# Altium PCB d_efx.PcbDoc (part 2 of 2)
Units mm, origin at the board's own origin, x right, y up, seen from the top; angles counter-clockwise.
Board outline 73.09 x 90.97 mm, 2 copper layers (Top Layer, Bottom Layer); 115 components, 88 nets, 354 pads, 67 vias.
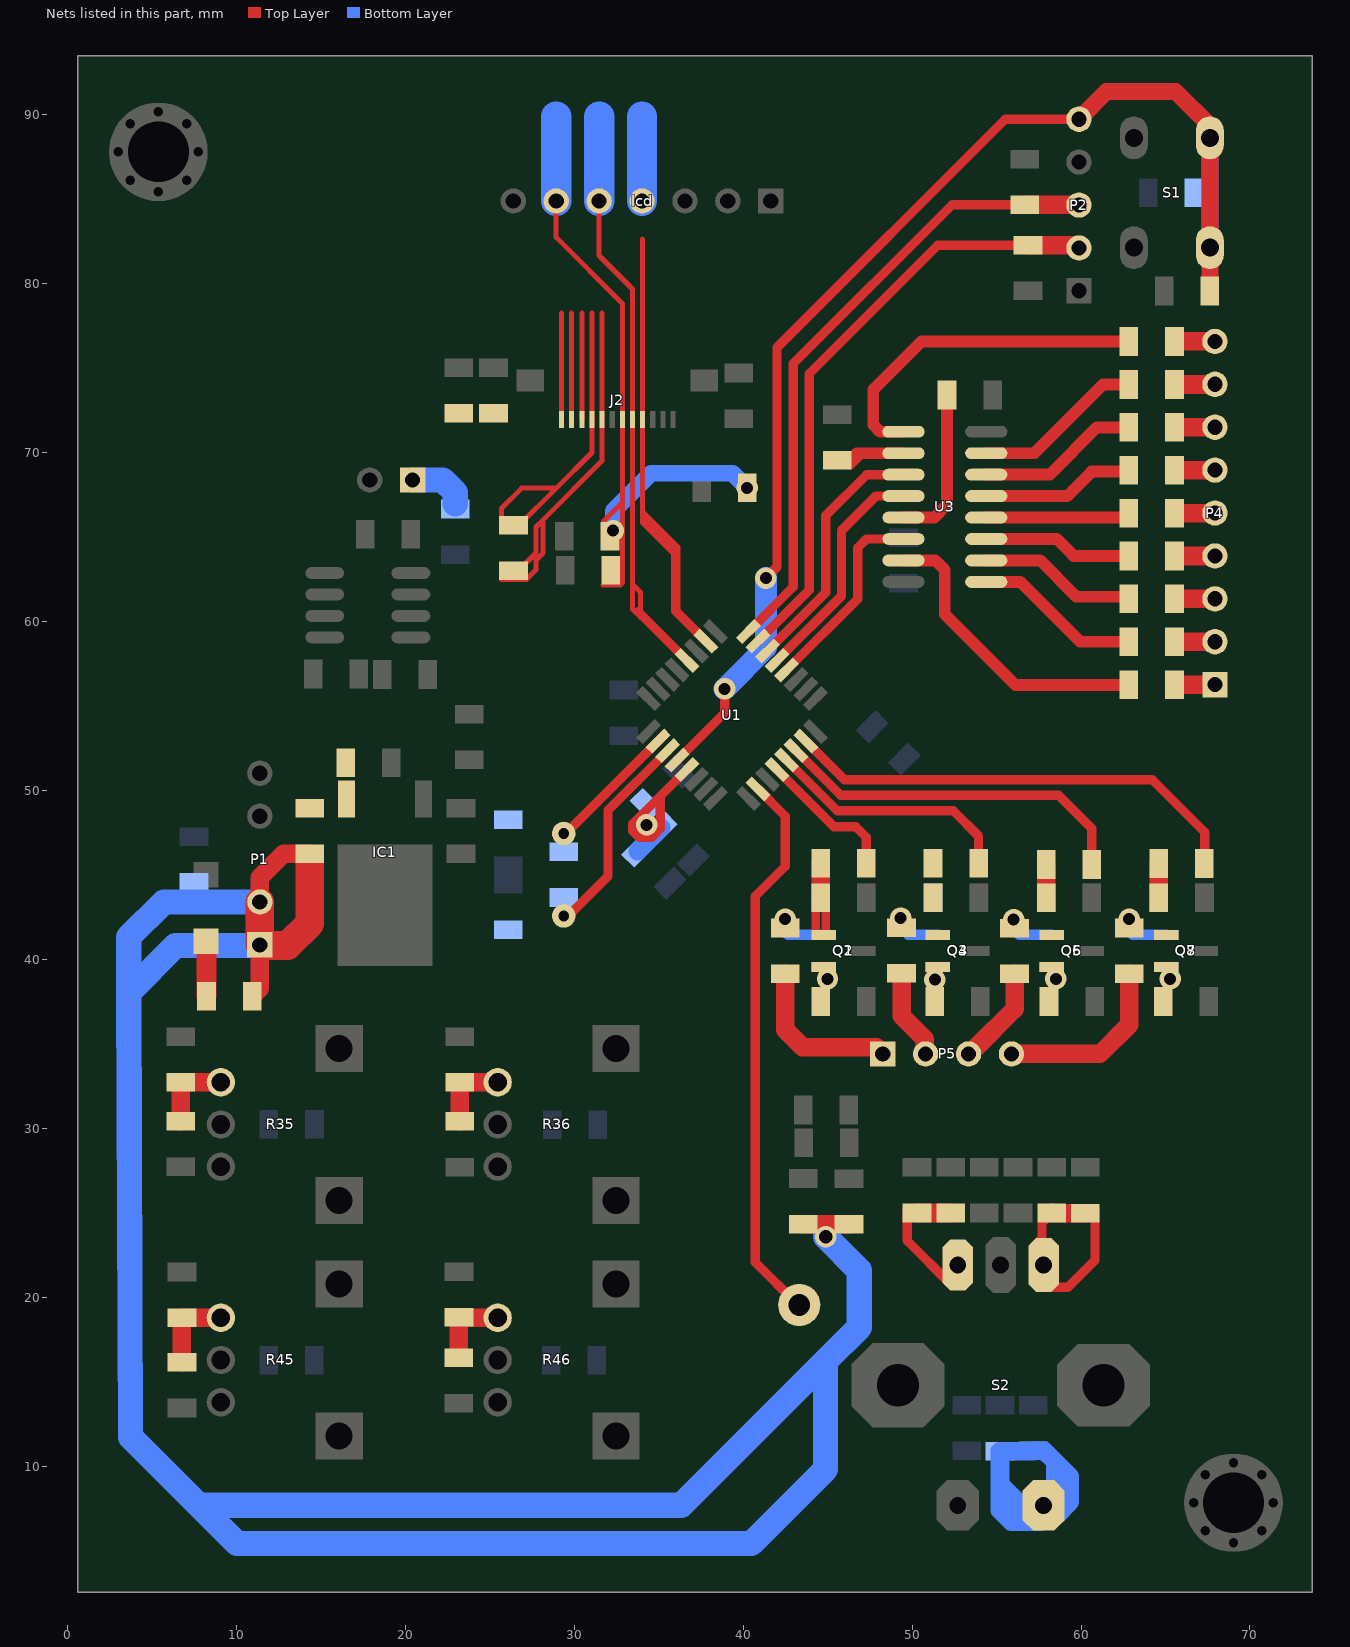
[diagram p2: the nets of this part, all layers, seen from the top]

## Via types
v1: diameter 1.27, hole 0.711, Top Layer to Bottom Layer, 66 vias
v2: diameter 1.27, hole 0.8, Top Layer to Bottom Layer, 1 vias

## Nets (pads, with @x,y where several pads share a name; then routed paths per layer and width w, separated by ;. In a path a pad name is that pad's centre, name@x,y a point inside that pad or via, vN(x,y) a via of type N, cw(c..) or ccw(c..) an arc to the next point about the centre after c; other vN are vias at no path point) (continued)
LCD_SCL: J2.4 lcd.4 U1.26 | length 36.7
  Top Layer w0.3: 34.048,82.643 J2.4@34.048,71.96 34.048,66.499 ; 35.832,64.391 34.328,65.895 34.328,66.219 ; 35.943,63.943 34.048,65.838 34.048,66.499 ; 36.132,63.74 36.132,64.415 34.328,66.219 ; 34.048,66.499 34.328,66.219
  Top Layer w0.55: 36.005,64.234 36.005,60.625 U1.26@37.794,58.835
  Bottom Layer w1.8: lcd.4@34.011,84.898 34.011,89.898
LCD_SI: J2.5 lcd.5 U1.28 | length 36.4
  Top Layer w0.3: lcd.5@31.471,84.898 31.471,81.663 33.448,79.687 J2.5@33.448,71.96 33.448,60.737 33.935,60.249 ; 33.52,62.135 33.917,61.738 33.917,60.614
  Top Layer w0.55: 33.789,60.577 U1.28@36.663,57.704
  Bottom Layer w1.8: lcd.5@31.471,84.898 31.471,89.898
LCD_VB0+: C20.1 J2.8 | length 23.5
  Top Layer w0.3: C20.1@25.7,62.491 27.157,62.491 27.736,63.07 27.736,63.631 ; C20.1@26.399,63.002 C20.1@26.674,63.002 ; C20.1@26.75,63.002 C20.1@26.674,63.002 ; 31.648,78.26 J2.8@31.648,71.96 31.648,69.512 28.159,66.023 ; C20.1@26.674,63.002 27.736,64.064 ; 27.736,63.631 28.159,64.054 28.159,66.023 ; 27.736,63.631 27.736,64.064 ; 27.736,64.064 27.736,65.6 28.159,66.023
LCD_VB0-: C20.2 J2.9 | length 19.4
  Top Layer w0.3: C20.2@25.7,65.777 25.7,66.706 26.886,67.893 28.932,67.893 ; C20.2@26.36,65.741 26.78,65.741 28.932,67.893 ; 31.048,78.26 J2.9@31.048,71.96 31.048,70.009 28.932,67.893
LCD_VB1+: J2.11 | length 6.3
  Top Layer w0.3: J2.11@29.848,71.96 29.848,78.26
LCD_VB1-: J2.10 | length 6.3
  Top Layer w0.3: J2.10@30.448,71.96 30.448,78.26
LCD_VLCD: C22.1 J2.12 R20.2 | length 6.3
  Top Layer w0.3: J2.12@29.248,71.96 29.248,78.26
MIDI_RX: pad.2 U1.10 | length 33
  Top Layer w0.55: U1.10@40.877,50.096 42.491,48.481 42.491,45.517 40.71,43.736 40.71,22.073 pad.2@43.239,19.544
NetC4_1: C4.1 IC1.3 L2.2
NetC30_1: C30.1 Q2.1 R33.1 | length 5.8
  Top Layer w0.5: C30.1@44.287,43.055 44.287,41.604 44.439,41.453 Q2.1@44.762,41.453 44.886,41.577 C30.1@44.886,43.197
  Top Layer w1.1: C30.1@44.587,43.653 R33.1@44.587,45.685
NetC31_1: C31.1 L5.1 R35.1 | length 4.7
  Top Layer w1.1: C31.1@6.705,30.425 L5.1@6.705,32.722 9.075,32.722 R35.1@9.081,32.728
NetC32_1: C32.1 L6.1 R36.1 | length 4.6
  Top Layer w1.1: C32.1@23.229,30.407 L6.1@23.229,32.722 25.461,32.722 R36.1@25.467,32.728
NetC35_1: C35.1 Q4.1 R40.1
NetC36_1: C36.1 L7.1 R45.1 | length 5
  Top Layer w1.1: C36.1@6.776,16.141 L7.1@6.776,18.794 9.071,18.794 R45.1@9.081,18.784
NetC37_1: C37.1 L8.1 R46.1 | length 4.7
  Top Layer w1.1: C37.1@23.159,16.427 23.174,16.442 L8.1@23.174,18.803 23.192,18.784 R46.1@25.467,18.784
NetC38_1: C38.1 Q6.1 R47.1 | length 2
  Top Layer w1.1: C38.1@57.935,43.653 R47.1@57.935,45.612
NetC41_1: C41.1 Q8.1 R50.1 | length 2
  Top Layer w1.1: R50.1@64.605,45.682 64.609,45.678 C41.1@64.609,43.653
NetD1_1: 
NetD1_2: 
NetJ1_4: 
NetLED1_1: LED1.1 R1.1 | length 3.3
  Top Layer w1.2: LED1.1@8.197,41.071 8.229,41.039 R1.1@8.229,37.819
NetP3_1: P3.1 R17.1 | length 3.5
  Bottom Layer w1.5: P3.1@20.431,68.38 22.215,68.38 22.958,67.636 R17.1@22.958,66.976
NetP4_1: P4.1 R18.1 | length 2.4
  Top Layer w1.1: R18.1@65.533,56.265 P4.1@67.93,56.265
NetP4_2: P4.2 R19.1 | length 2.4
  Top Layer w1.1: R19.1@65.533,58.804 P4.2@67.93,58.805 P4.2@67.93,58.805
NetP4_3: P4.3 R21.1 | length 2.4
  Top Layer w1.1: R21.1@65.533,61.342 67.928,61.342 P4.3@67.93,61.345
NetP4_4: P4.4 R22.1 | length 2.4
  Top Layer w1.1: R22.1@65.533,63.881 67.926,63.881 P4.4@67.93,63.885
NetP4_5: P4.5 R24.1 | length 2.4
  Top Layer w1.1: R24.1@65.533,66.419 67.925,66.419 P4.5@67.93,66.425
NetP4_6: P4.6 R25.1 | length 2.4
  Top Layer w1.1: R25.1@65.533,68.958 67.924,68.958 P4.6@67.93,68.965
NetP4_7: P4.7 R27.1 | length 2.4
  Top Layer w1.1: R27.1@65.533,71.497 67.922,71.497 P4.7@67.93,71.505
NetP4_8: P4.8 R28.1 | length 2.4
  Top Layer w1.1: R28.1@65.533,74.035 67.921,74.035 P4.8@67.93,74.045
NetP4_9: P4.9 R29.1 | length 2.4
  Top Layer w1.1: R29.1@65.533,76.574 65.544,76.585 P4.9@67.93,76.585
NetP5_1: P5.1 R38.1 | length 9.7
  Top Layer w1.1: R38.1@42.483,39.157 42.483,35.839 43.529,34.793 47.871,34.793 P5.1@48.261,34.403
NetP5_2: P5.2 R39.1 | length 5.3
  Top Layer w1.1: R39.1@49.375,39.168 49.375,36.67 50.757,35.289 P5.2@50.757,34.473
NetP5_3: P5.3 R41.1 | length 5.3
  Top Layer w1.1: P5.3@53.767,34.764 56.067,37.064 R41.1@56.067,39.138
NetP5_4: P5.4 R42.1 | length 10.7
  Top Layer w1.1: P5.4@55.881,34.403 61.118,34.403 62.848,36.132 R42.1@62.848,39.159
NetQ1_1: Q1.1 Q2.2 R32.2
  other v1: 44.992,38.851
NetQ3_1: Q3.1 Q4.2 R37.2
  other v1: 51.344,38.806
NetQ5_1: Q5.1 Q6.2 R44.2
  other v1: 58.514,38.849
NetQ7_1: Q7.1 Q8.2 R49.2
  other v1: 65.281,38.849
NetR9_1: R9.1 R11.1 S2.1 | length 10.7
  Top Layer w0.55: S2.1@57.217,23.01 57.692,23.485 57.692,24.416 R11.1@58.264,24.987 ; S2.1@58.137,20.593 59.233,20.593 60.828,22.189 R9.1@60.828,25.112
  Top Layer w1.1: R11.1@58.264,24.987 58.268,24.983 R9.1@60.255,24.983
NetR10_1: R10.1 R12.2 S2.4 | length 19.8
  Bottom Layer w0.55: S2.4@57.171,8.292 S2.4@57.785,7.678 ; R10.1@57.171,10.894 R10.1@57.177,10.9
  Bottom Layer w1.1: R10.1@57.171,10.894 R12.2@55.203,10.894 55.203,8.924 ; R10.1@57.177,10.9 57.832,10.9 58.491,10.241 ; S2.4@57.313,6.813 55.203,8.924 ; S2.4@57.604,6.723 55.863,6.723 55.203,7.383 55.203,8.924 ; S2.4@58.491,7.91 58.491,10.241 ; S2.4@58.559,7.096 59.345,7.882 59.345,9.386 58.491,10.241
NetR13_1: R13.1 R14.2 S2.2 | length 7.4
  Top Layer w0.55: R14.2@49.718,25.195 49.718,23.337 S2.2@52.247,20.807
  Top Layer w1.1: R14.2@50.294,24.987 R13.1@52.286,24.987
NetR18_2: R18.2 U3.15 | length 18
  Top Layer w0.7: U3.15@49.493,63.618 51.371,63.618 51.935,63.054 51.935,60.432 56.128,56.239 R18.2@62.877,56.239
NetR19_2: R19.2 U3.1 | length 9.9
  Top Layer w0.7: U3.1@54.393,62.348 56.397,62.348 59.941,58.804 R19.2@62.833,58.804
NetR21_2: R21.2 U3.2 | length 9.3
  Top Layer w0.7: U3.2@54.393,63.618 57.574,63.618 59.72,61.472 R21.2@62.761,61.472
NetR22_2: R22.2 U3.3 | length 8.9
  Top Layer w0.7: U3.3@54.393,64.888 58.553,64.888 59.56,63.881 R22.2@62.833,63.881
NetR24_2: R24.2 U3.4 | length 8.5
  Top Layer w0.7: U3.4@54.393,66.158 62.473,66.158 R24.2@62.764,66.449
NetR25_2: R25.2 U3.5 | length 9.1
  Top Layer w0.7: U3.5@54.393,67.428 59.173,67.428 60.621,68.877 R25.2@62.925,68.877
NetR27_2: R27.2 U3.6 | length 9.6
  Top Layer w0.7: U3.6@54.393,68.698 58.144,68.698 60.943,71.497 R27.2@62.833,71.497
NetR28_2: R28.2 U3.7 | length 10.2
  Top Layer w0.7: U3.7@54.393,69.968 57.24,69.968 61.31,74.038 R28.2@62.939,74.038
NetR29_2: R29.2 U3.9 | length 20.4
  Top Layer w0.7: U3.9@49.493,71.238 48.1,71.238 47.699,71.639 47.699,73.73 50.543,76.574 R29.2@62.833,76.574
NRST: C15.1 P2.5 R4.1 S1.3 S1.4 U1.4 | length 76.5
  Top Layer w0.55: U1.4@36.097,51.793 38.905,54.601 v1(38.905,56.012) ; v1(41.341,62.571) 41.998,63.228 41.998,76.226 55.509,89.737 P2.5@59.878,89.737
  Top Layer w1: P2.5@59.878,89.737 61.517,91.376 65.603,91.376 67.626,89.353 S1.4@67.626,88.634 S1.3@67.626,82.134 R4.1@67.626,79.562
  Bottom Layer w1: S1.3@67.626,82.134 S1.4@67.626,88.634 S1.4@67.626,89.222
  Bottom Layer w1.3: v1(38.905,56.012) 41.341,58.448 v1(41.341,62.571)
OE: R30.2 U3.13 | length 9.4
  Top Layer w0.7: U3.13@49.493,66.158 51.301,66.158 52.065,66.921 R30.2@52.065,73.408
OSC_IN: C16.1 R8.1 U1.2 Y1.2 | length 7.9
  Top Layer w0.55: Y1.2@29.377,47.451 29.493,47.451 U1.2@34.966,52.924
OSC_OUT: C14.2 R8.2 U1.3 Y1.1 | length 12.5
  Top Layer w0.55: Y1.1@29.377,42.571 29.648,42.571 32.002,44.925 32.002,48.829 U1.3@35.531,52.358
PWM1: R33.2 U1.12 | length 8.5
  Top Layer w0.55: U1.12@42.008,51.227 45.377,47.859 46.665,47.859 47.287,47.237 R33.2@47.287,45.685
PWM2: R40.2 U1.13 | length 14.8
  Top Layer w0.55: U1.13@42.574,51.793 45.565,48.802 52.432,48.802 53.936,47.298 R40.2@53.936,45.685
PWM3: R47.2 U1.14 | length 21.5
  Top Layer w0.55: U1.14@43.14,52.358 45.781,49.717 58.662,49.717 60.635,47.744 R47.2@60.635,45.612
PWM4: R50.2 U1.15 | length 27.8
  Top Layer w0.55: U1.15@43.705,52.924 45.997,50.633 64.214,50.633 67.323,47.524 R50.2@67.323,45.538
RCLK: U1.21 U3.12 | length 13.8
  Top Layer w0.55: U1.21@42.008,57.704 45.816,61.512 45.816,65.384 47.86,67.428 U3.12@49.493,67.428
SER: U1.20 U3.14 | length 11.9
  Top Layer w0.55: U1.20@42.574,57.138 46.775,61.339 46.775,64.367 47.296,64.888 U3.14@49.493,64.888
SRCLK: U1.22 U3.11 | length 15
  Top Layer w0.55: U1.22@41.443,58.27 44.893,61.72 44.893,66.278 47.312,68.698 U3.11@49.493,68.698
SRCLR: R31.2 U3.10 | length 5
  Top Layer w0.7: R31.2@45.564,69.544 46.296,69.544 46.72,69.968 46.941,69.968 ; R31.2@46.315,69.342 46.941,69.968 ; U3.10@49.493,69.968 46.941,69.968
SWCLK: P2.3 R7.1 U1.24 | length 37.8
  Top Layer w0.55: U1.24@40.311,59.401 42.964,62.054 42.964,75.271 52.372,84.678 R7.1@56.669,84.678
  Top Layer w1.1: R7.1@56.669,84.678 59.857,84.678 P2.3@59.878,84.657
SWDIO: P2.2 R6.1 U1.23 | length 36.3
  Top Layer w0.55: U1.23@40.877,58.835 43.904,61.863 43.904,74.667 51.512,82.275 R6.1@56.861,82.275
  Top Layer w1.1: R6.1@56.861,82.275 59.721,82.275 P2.2@59.878,82.117
VCC: C1.1 C7.1 L1.1 L2.1 P1.1 P1.2 R1.2 | length 169.1
  Top Layer w1.1: R1.2@10.929,37.819 11.386,38.276 P1.1@11.386,40.859 ; P1.2@11.386,43.399 11.386,44.843 12.793,46.251 L2.1@14.333,46.251 ; C1.1@43.559,24.33 43.575,24.314 L1.1@46.267,24.314
  Top Layer w1.7: P1.1@11.386,40.859 P1.2@11.386,43.399 ; P1.1@11.569,40.825 13.04,40.825 14.333,42.118 L2.1@14.333,45.715
  Bottom Layer w1.5: P1.1@11.297,40.841 6.396,40.819 3.618,38.016 ; P1.2@11.386,43.399 5.704,43.399 3.618,41.313 3.618,38.016 ; v2(44.878,23.588) 46.873,21.594 46.873,18.219 44.877,16.224 ; 3.618,38.016 3.733,11.714 7.761,7.687 ; 7.761,7.687 10.031,5.417 40.485,5.417 44.877,9.809 44.877,16.224 ; 7.761,7.687 36.341,7.687 44.877,16.224
VDD_LCD: C24.1 J2.6 L4.2 lcd.6 R26.1 | length 42.8
  Top Layer w0.3: lcd.6@28.931,84.898 28.931,82.748 32.848,78.831 J2.6@32.848,71.96 32.848,67.053 ; 31.705,62.166 32.724,62.166 32.848,62.289 32.848,67.053 ; C24.1@31.725,65.521 31.725,65.93 32.848,67.053
  Bottom Layer w1: v1(32.307,65.377) 32.307,66.546 34.539,68.778 39.374,68.778 v1(40.239,67.913)
  Bottom Layer w1.8: lcd.6@28.931,84.898 28.931,89.898
VDDA: C8.1 C9.1 L3.2 U1.5 | length 10.7
  Top Layer w0.55: 35.095,49.576 35.095,47.74 34.568,47.213 33.859,47.213 33.471,47.601 33.471,48.035 U1.5@36.663,51.227
  Bottom Layer w1.1: C9.1@33.758,46.417 C8.1@35.138,47.797
  other v1: 34.279,47.96
VOL1: Q1.2 R34.1 R38.2 | length 3.1
  Bottom Layer w0.635: v1(42.48,42.385) 42.48,41.633 42.66,41.453 Q1.2@44.762,41.453
VOL2: Q3.2 R39.2 R43.1 | length 3
  Bottom Layer w0.635: v1@49.38,42.58 49.38,41.852 49.779,41.453 Q3.2@51.521,41.453
  other v1: 49.324,42.45
VOL3: Q5.2 R41.2 R48.1 | length 3
  Bottom Layer w0.635: v1(56.006,42.355) 56.006,41.802 56.355,41.453 Q5.2@58.279,41.453
VOL4: Q7.2 R42.2 R51.1 | length 3
  Bottom Layer w0.635: v1(62.844,42.381) 62.844,41.669 63.06,41.453 Q7.2@65.038,41.453
pads on no net: ?.P

## Other copper
Top Layer:
  rectangle net +3.3V: 19.223,39.599 24.151,46.8
  rectangle net LCD_VLCD: 22.317,71.46 29.247,72.88
  rectangle net +3.3V: 19.779,62.836 21.476,66.025
  rectangle net GND: 14.114,58.993 16.205,62.91
  rectangle net +5V: 45.701,26.464 47.674,31.935
  rectangle net GND: 42.096,26.48 43.554,31.932
  rectangle net VCC: 42.707,22.898 47.119,24.734
  rectangle net GND: 54.212,70.886 56.253,74.255
  rectangle net GND: 36.873,74.165 39.731,75.261
  rectangle net LCD_CSB: 35.864,71.46 39.594,72.562
  rectangle net VDD_LCD: 31.561,62.184 32.839,65.81
  rectangle net GND: 22.312,12.87 24.617,13.46
  rectangle net NetC41_1: 64.058,41.153 65.133,43.62
  rectangle net NetC38_1: 57.383,41.153 58.368,43.532
  rectangle net GND: 53.147,40.555 54.588,42.579
  rectangle net GND: 59.9,40.522 61.346,42.679
  rectangle net GND: 66.662,40.361 68.101,42.579
  rectangle net +3.3V: 48.244,60.899 50.742,62.387
  rectangle net GND: 20.576,48.39 24.141,52.413
  rectangle net GND: 20.602,48.398 24.141,49.504
  rectangle net NetC4_1: 13.475,48.425 17.045,52.498
  rectangle net NetC30_1: 44.287,41.453 44.762,43.055
  region net GND: 53.977,6.792 53.977,17.048 51.524,17.048 51.524,6.792
  region net GND: 61.197,12.352 61.197,17.228 49.75,17.228 49.75,12.352
  region net NetR13_1: 53.135,21.595 53.135,25.269 51.305,25.269 51.305,21.595
  rectangle net GND: 46.393,40.403 47.837,42.579
  rectangle net NetC35_1: 50.689,41.152 51.789,45.524
  rectangle net NetQ7_1: 64.313,38.32 65.413,39.553
  rectangle net NetQ5_1: 57.553,37.812 58.65,39.417
  rectangle net NetQ3_1: 50.795,37.506 51.895,39.612
  rectangle net NetQ1_1: 44.04,38.304 45.137,39.351
  region net GND: 28.222,74.911 26.846,75.535 26.692,75.381 26.692,74.305 27.739,74.305 27.891,74.153
  region net GND: 14.52,59.817 13.867,59.164 13.867,59.093 12.356,59.093 12.112,59.337 12.112,59.975
  region net GND: 16.862,61.466 16.087,60.691 15.55,60.691 15.55,61.622 15.55,61.623
  region net GND: 17.077,64.7 17.077,62.805 16.792,62.52 16.548,62.764 14.744,62.764
  region net GND: 16.891,62.857 17.912,61.837 17.912,61.819 15.203,61.819 15.15,61.767 15.15,62.805
  region net GND: 20.818,54.189 21.953,53.054 21.953,52.334 21.517,51.898 19.887,51.898 19.887,52.447 18.73,53.604
  region net GND: 11.753,56.275 13.608,54.42 13.165,53.977 11.274,53.977
  region net GND: 17.891,68.38 17.631,68.119 17.631,65.469 17.197,64.779 15.702,63.541 15.491,63.073 15.086,62.237 13.435,60.586 9.412,60.586 9.412,62.581 9.378,62.615 15.121,68.357 16.359,68.357 16.702,68.701
  region net GND: 62.699,88.741 60.671,88.093 59.485,87.293 62.699,84.521
  region net VCC: 14.017,46.278 14.017,42.274 14.306,41.986 12.896,40.577 11.551,40.577 11.551,45.029 11.455,45.125 12.576,46.246 12.576,46.278
  region net LCD_CSB: 35.924,72.729 36.214,72.438 36.087,72.438 35.931,72.282
  region net LCD_VLCD: 29.127,71.667 28.916,71.877 29.164,71.877 29.248,71.96
  region net LCD_VLCD: 29.141,73.095 28.792,72.746 29.131,72.746 29.222,72.655
  region net +3.3V: 20.009,63.699 19.364,62.991 20.213,63.133
  region net ADC1: 13.197,16.268 11.394,16.91 11.432,15.66
  region net ADC3: 29.967,16.234 28.164,16.876 28.202,15.626
  region net ADC2: 29.868,30.17 28.065,30.812 28.103,29.562
  region net ADC0: 11.399,32.079 10.757,30.275 12.007,30.314
  region net MIDI_RX: 40.71,22.073 42.516,18.645 44.081,20.554
  region net ENC_2: 57.234,30.106 55.433,28.227 59.112,28.236
  region net ENC_1: 54.291,29.87 51.478,28.218 55.112,28.218
  region net ADC3: 40.522,49.319 40.979,48.862 40.979,47.118 39.684,45.823 39.684,46.039 39.302,46.421 39.302,46.703 40.181,47.582 40.311,47.582 40.311,48.542 40.464,48.695
  region net GND: 31.855,56.826 33.015,56.826 33.015,56.785 34.286,55.514 34.022,55.25 34.022,55.233 32.265,55.233 31.66,55.838 31.632,55.838 31.632,56.393 31.544,56.481
  region net +3.3V: 34.359,53.987 34.671,53.675 32.651,51.937 31.307,52.453 31.108,53.4 31.613,54.045
  region net LCD_CSB: 35.787,72.446
  region net LCD_VB0-: 28.785,67.834 27.065,66.114 27.065,66.082 25.702,66.082 25.681,66.103 25.7,66.122 25.7,66.706 26.886,67.893
  region net LCD_VB0+: 28.175,65.889 28.175,64.164 28.096,64.164 27.672,63.74 27.623,63.789 27.623,65.682
  region net LCD_VB0+: 27.718,63.917 27.736,63.899 27.736,63.213 27.129,62.605 26.966,62.605 26.966,63.37 27.204,63.608
  region net VDD_LCD: 32.828,67.033 32.828,65.982 32.551,65.705 31.874,65.705 31.874,65.78 31.725,65.93 32.514,66.719 32.523,66.719
  region net GND: 32.182,68.155 32.248,68.09 32.248,67.025 31.526,66.304 30.242,66.304 29.79,65.851 29.523,65.851 29.276,65.604 28.989,65.891 28.94,65.891 28.94,65.94 30.358,67.358 30.358,67.384 31.411,67.384
  region net VDD_LCD: 32.806,66.497 31.905,65.596 31.905,65.268 32.089,65.268 32.693,64.664
  region net GND: 23.492,51.767 23.59,51.865 24.819,51.865 24.819,51.669 26.22,50.267 26.196,50.242 26.196,47.391 25.753,47.391 23.811,49.333
  region net GND: 5.927,13.991 4.87,13.991 4.87,12.758 5.121,12.507 6.56,12.507
  region net GND: 24.617,13.46
  region net VDDA: 35.073,49.576 35.294,47.715 34.649,47.132 33.859,47.213 33.321,47.653 33.559,48.363
  region net GND: 7.34,5.503 3.27,9.574 3.27,12.573 3.42,12.723 4.598,12.723 5.54,11.78 5.544,11.784 49.259,11.784 52.733,8.31 52.733,7.581 52.626,7.581 50.484,5.439 7.661,5.439 7.575,5.525
  region net GND: 11.386,51.019 11.386,47.583 4.667,40.864 3.801,40.864 3.801,46.059 9.838,52.096 10.758,52.096
  region net +3.3V: 50.005,52.295 50.511,51.788 50.511,51.756 51.137,51.756 51.719,52.339 51.719,53.26 48.099,56.88 45.71,56.88 45.269,56.439 45.269,56.201 47.297,56.201 49.335,54.162 49.335,52.932
  region net GND: 44.158,53.726 44.293,53.861 45.175,53.861 45.175,53.586 44.725,53.137
  region net GND: 46.138,54.666 46.969,54.666 47.997,53.637 47.997,53.138 47.043,52.184 45.87,52.184 44.763,53.291
  region net NetC41_1: 65.544,41.496 65.072,42.392 65.072,41.314
  region net NetC38_1: 58.754,41.366 58.282,42.262 58.282,41.184
  region net PWM1: 47.358,47.049 46.789,46.479 47.431,46.479
  region net PWM1: 47.823,46.476 47.254,47.046 47.254,46.403
  region net PWM2: 53.99,47.035 53.421,46.466 54.064,46.466
  region net PWM2: 54.472,46.462 53.902,47.031 53.902,46.389
  region net PWM4: 67.843,46.49 67.273,47.059 67.273,46.416
  region net PWM4: 67.361,47.078 66.792,46.509 67.435,46.509
  region net PWM3: 60.725,47.004 60.156,46.435 60.799,46.435
  region net PWM3: 61.159,46.38 60.59,46.949 60.59,46.306
  region net NetP5_4: 63.088,38.085 63.657,38.654 63.015,38.654
  region net NetP5_4: 62.044,38.702 62.613,38.132 62.613,38.775
  region net NetP5_3: 56.226,38.064 56.795,38.634 56.153,38.634
  region net NetP5_3: 55.297,38.671 55.866,38.102 55.866,38.745
  region net NetP5_2: 49.598,38.121 50.167,38.691 49.525,38.691
  region net NetP5_2: 48.573,38.733 49.142,38.164 49.142,38.807
  region net NetP5_1: 42.717,38.108 43.286,38.678 42.644,38.678
  region net NetP5_1: 41.709,38.689 42.278,38.12 42.278,38.763
  region net LCD_SI: 33.441,62.134 33.796,61.779 33.917,61.779 33.917,60.614 33.582,60.614 33.423,60.774
  region net LCD_A0: 34.648,68.661 35.568,67.741 35.615,67.741 35.615,66.693 35.591,66.718 34.999,66.718 34.999,66.727 34.648,67.079 34.648,68.111 34.61,68.148
  region net LCD_RST: 35.248,70.109 35.529,70.109 36.945,68.693 36.945,67.966 36.768,67.789 36.709,67.789 35.248,69.251
  region net GND: 19.435,51.587 21.418,49.293 21.418,51.587
  region net GND: 46.901,16.783 46.901,11.923 43.691,11.923 42.866,12.748
  region net NetC30_1: 45.487,41.753 45.041,42.4 45.041,41.556
  region net GND: 46.926,16.77 48.484,18.328 52.882,18.328 52.951,18.259 50.66,15.969 50.66,14.915 48.667,14.915 48.094,14.342
  region net GND: 58.179,18.174 58.393,18.388 61.076,18.388 61.076,17.885 62.051,16.909 60.649,15.506 59.734,15.506
  region net GND: 53.659,8.949 53.498,13.822 53.523,13.797 55.873,13.797 57.507,12.796 55.873,11.163
  region net GND: 46.962,12.06 51.278,7.744 51.697,7.744 52.897,8.945 52.897,14.647 52.097,15.448 51.321,14.672 47.245,14.672
  region net GND: 55.22,20.247 58.554,16.912 58.554,16.75 51.295,16.75 51.192,16.646
  region net GND: 53.429,24.438 55.316,25.08 57.121,24.438 55.535,22.262 54.746,22.505
  region net NetR13_1: 49.741,25.054 49.875,24.92 51.736,24.92 51.736,22.544 51.214,22.021 49.782,23.453 49.718,23.453
  region net NetR9_1: 57.785,21.912 57.815,21.942 57.815,24.917 60.44,24.917 60.612,25.089 60.831,24.87 60.831,22.261 59.237,20.667 58.081,20.667
  region net NetQ3_1: 52.246,39.255 51.88,38.433 51.59,39.304
  region net NetC35_1: 52.246,41.753 51.774,42.649 51.774,41.571
  region net LCD_CSB: 41.631,81.915 40.883,84.913 42.379,84.913
  region net LCD_RST: 39.091,82.61 38.338,84.913 39.835,84.913
  region net LCD_A0: 36.559,81.737 35.804,84.913 37.301,84.913
  region net LCD_SCL: 34.049,80.964 33.265,84.913 34.762,84.913
  region net LCD_SI: 31.471,81.663 30.725,84.913 32.222,84.913
  region net VDD_LCD: 28.911,82.583 28.186,84.913 29.683,84.913
  region net GND: 26.391,82.008 25.644,84.913 27.141,84.913
Bottom Layer:
  region net GND: 45.7,52.242 48.033,54.575 47.051,55.557 44.718,53.224
  rectangle net GND: 42.125,29.154 43.532,31.881
  rectangle net +5V: 46.127,29.461 47.711,32.042
  rectangle net GND: 38.849,29.368 43.062,31.665
  rectangle net VCC: 43.804,22.876 45.844,24.871
  region net VDDA: 35.389,47.266 36.164,48.041 34.449,49.756 33.674,48.981
  rectangle net OSC_OUT: 25.574,41.212 30.226,42.313
  rectangle net OSC_IN: 25.574,47.706 30.226,48.807
  rectangle net +3.3V: 15.943,39.612 23.88,46.759
  rectangle net OSC_IN: 28.527,46.361 30.226,48.445
  rectangle net OSC_OUT: 28.527,41.671 30.227,43.661
  rectangle net GND: 25.296,44.004 26.874,45.967
  rectangle net VOL4: 64.056,41.273 65.162,43.85
  rectangle net VOL3: 57.379,41.279 58.485,43.856
  rectangle net VOL2: 50.719,41.366 51.81,43.943
  rectangle net VOL1: 44.036,41.323 45.142,43.9
  rectangle net NetQ7_1: 64.313,37.988 65.759,39.781
  rectangle net NetQ5_1: 57.554,37.758 59.004,39.553
  rectangle net NetQ3_1: 50.795,37.521 52.242,39.704
  rectangle net +5V: 66.601,36.381 68.416,40.854
  rectangle net +5V: 59.913,36.731 61.681,40.803
  rectangle net +5V: 53.156,36.701 54.864,40.8
  rectangle net +5V: 46.387,37.68 48.201,40.852
  rectangle net NetQ1_1: 44.041,37.539 45.487,39.723
  region net GND: 24.622,89.174 26.391,87.405 26.391,81.956 26.58,81.768 23.959,79.147 12.603,79.147 10.623,81.127 18.456,88.96
  region net GND: 26.391,84.898 26.325,84.832 26.325,80.793 20.517,80.793 20.477,80.753
  region net GND: 11.931,51.203 11.931,48.388 6.998,48.612 6.998,49.05 5.904,50.144 5.969,50.209 5.969,76.671 10.456,81.158 10.653,80.96 31.664,80.96 31.664,78.684 26.871,73.891 26.871,68.682 26.521,68.682 23.391,71.812 23.15,71.571 18.817,71.074 18.379,68.748 17.898,68.266 14.965,68.266 11.386,64.687
  region net VCC: 11.928,43.35 11.928,40.859 6.558,40.859 4.521,38.822 3.872,38.822 3.872,41.308 3.807,41.373 5.861,43.426 5.861,43.469 9.038,43.469 9.167,43.599
  region net VCC: 45.184,16.747 45.184,9.744 40.05,5.077 9.844,5.077 8.749,6.172 7.176,8.056 8.856,8.056 36.918,8.209 43.571,15.487
  region net +3.3V: 61.975,79.577 64.041,77.511 63.82,77.29 63.82,58.014 58.039,58.014 53.605,62.449 57.197,66.041 57.478,66.041 57.478,78.334 57.253,78.558 58.272,79.577
  region net +3.3V: 45.495,72.33 45.537,72.288 45.537,63.848 45.705,63.848 47.834,61.72 49.481,61.72 49.481,60.702 50.408,59.775 50.366,59.733 44.488,59.733 43.941,60.279 43.941,63.806 43.563,63.806 42.136,65.233 42.136,70.986 42.307,70.986 43.564,72.244
  region net GND: 37.698,74.261 29.317,65.88 29.144,65.88 29.144,66.046 27.225,67.965 27.225,74.384 28.912,74.384 30.798,76.27
  region net GND: 27.398,74.261 27.414,74.277 27.414,78.274 27.567,78.274 30.77,81.477 43.988,81.477 49.937,87.425 57.004,87.425 57.004,87.12 55.224,85.341 55.224,67.343 55.275,67.292 53.038,65.055 53.038,65.004 49.53,65.004 49.377,64.852 49.096,72.607 47.037,74.261 27.465,74.562
  region net +3.3V: 19.607,39.888 22.713,36.782 22.713,36.417 23.307,37.01 23.307,40.665
  region net +3.3V: 28.903,62.852 28.903,61.999 23.792,56.888 21.719,56.888 21.719,56.833 19.762,54.876 19.762,50.674 19.858,50.674 23.267,47.264 23.267,45.264 17.373,45.264 14.474,48.164 14.474,56.347 13.933,56.888 14.329,57.285 14.329,60.961 17.447,64.079 28.063,64.079
  region net GND: 41.379,29.614 40.654,28.889 40.093,28.889 40.093,29.874 39.847,30.12
  region net GND: 40.285,32.514 41.256,31.543 41.256,31.337 40.435,31.337 40.271,31.173
  region net +3.3V: 70.192,35.305 70.235,35.263 70.235,29.316 61.186,20.267 60.915,20.538 60.157,24.322 50.32,28.231 52.999,30.91 65.452,30.91 69.589,35.047
  region net +3.3V: 49.408,62.581 59.511,62.581 64.041,57.678 64.041,55.028 70.194,48.875 70.082,48.762 70.082,46.496 69.974,46.389 66.844,49.518 48.193,49.518 47.557,50.154 49.467,52.064 50.039,52.064 50.039,52.329 52.727,55.524 52.727,57.412 49.028,61.111
  region net GND: 39.434,38.866 39.806,38.494 39.806,15.635 35.903,11.732 32.279,11.732 32.279,34.87 34.602,37.193 34.602,38.959
  region net GND: 43.352,47.483 39.805,43.937 39.805,38.629 39.846,38.588 35.997,34.739 32.396,34.739 32.467,34.81 32.467,41.308 38.628,47.678
  region net VDDA: 33.269,49.38 32.783,46.207 34.283,46.386 35.603,47.706
  region net OSC_IN: 27.723,47.751 28.683,46.79 29.054,48.041
  region net OSC_OUT: 28.701,43.148 27.741,42.188 28.991,41.816
  region net GND: 32.128,61.95 27.184,57.006 27.184,56.098 34.353,56.098
  region net GND: 30.79,63.436 30.848,63.379 30.848,60.905 31.586,60.905 32.772,62.091
  region net GND: 32.282,57.757 30.602,56.302 30.958,55.946 32.927,55.946
  region net GND: 33.179,62.752 35.192,60.739 36.435,55.345 32.541,56.248
  region net +5V: 48.09,37.884 48.825,36.785 47.515,36.823
  region net +3.3V: 57.264,17.325 56.326,16.388 56.326,13.942 56.832,13.969 57.105,13.695
  region net ENC_BTN: 53.037,16.96 55.279,14.718 55.586,14.718 55.586,13.864 55.346,13.623 55.226,13.744 52.97,13.744
  region net +5V: 48.201,37.68 47.305,36.28 47.239,37.881
  region net +5V: 60.351,39.955 59.966,40.34 60.524,40.491
  region net VOL4: 62.239,42.597 63.438,41.399 65.376,41.399 65.507,41.53 65.763,41.752 64.204,43.846
  region net VOL3: 55.562,42.603 56.761,41.405 58.699,41.405 59.004,41.751 57.527,43.852
  region net VOL2: 48.973,42.662 50.172,41.464 52.11,41.464 52.241,41.595 52.241,41.768 50.938,43.911
  region net VOL1: 41.981,42.496 43.029,41.448 45.356,41.448 45.487,41.579 45.487,41.753 44.184,43.895
  region net NetR10_1: 54.354,10.345 54.84,9.858 54.84,10.807 54.789,10.859
  region net NetR10_1: 55.203,10.894 55.209,10.9 57.832,10.9 58.451,10.28 58.451,8.736 57.439,7.724 55.438,7.724 55.158,8.004
  region: 44.045,43.794
  region net +5V: 53.572,39.883 53.188,40.267 53.745,40.418
  region: 46.406,40.66
  region: 46.415,40.756

## Silkscreen, mask and mechanical layers (free items; w line width, h text height)
Top Overlay:
  lines w0.5: 26.513,50.243 26.513,79.243 ; 37.513,50.243 37.513,79.243 ; 9.013,50.243 55.013,50.243 55.013,79.243 9.013,79.243 9.013,50.243
Mechanical 1:
  the board outline again, w1.2

## Text inside footprints (layer, text, board x,y; h text height)
J2: Top Overlay "12" at 28.591,72.026 h0.9 r180; Top Overlay "1" at 37.214,71.896 h0.9 r180
lcd: Top Overlay "7" at 25.883,87.262 h1 r270; Top Overlay "6" at 28.423,87.214 h1 r270; Top Overlay "5" at 30.963,87.262 h1 r270; Top Overlay "4" at 33.503,87.309 h1 r270; Top Overlay "3" at 36.043,87.262 h1 r270; Top Overlay "2" at 38.583,87.262 h1 r270; Top Overlay "1" at 41.123,86.833 h1 r270; Top Overlay "1" at 41.123,86.833 h1 r270
P1: Top Overlay "1" at 12.935,39.589 h1
P5: Top Overlay "1" at 48.737,32.104 h1 r90; Top Overlay "2" at 51.309,32.038 h1 r90; Top Overlay "3" at 53.849,32.038 h1 r90; Top Overlay "4" at 56.389,31.991 h1 r90